# EAGLE board DS1307A (EAGLE 5.06)
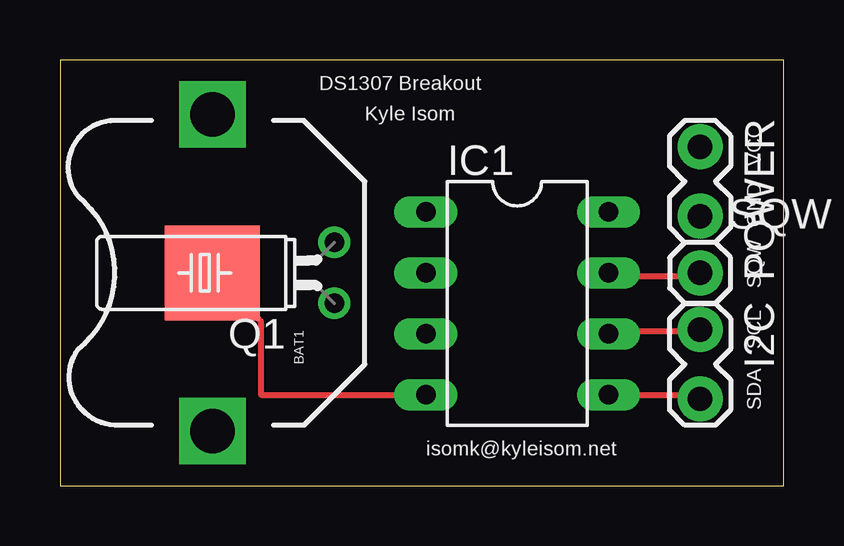
[diagram p0: board, top side]
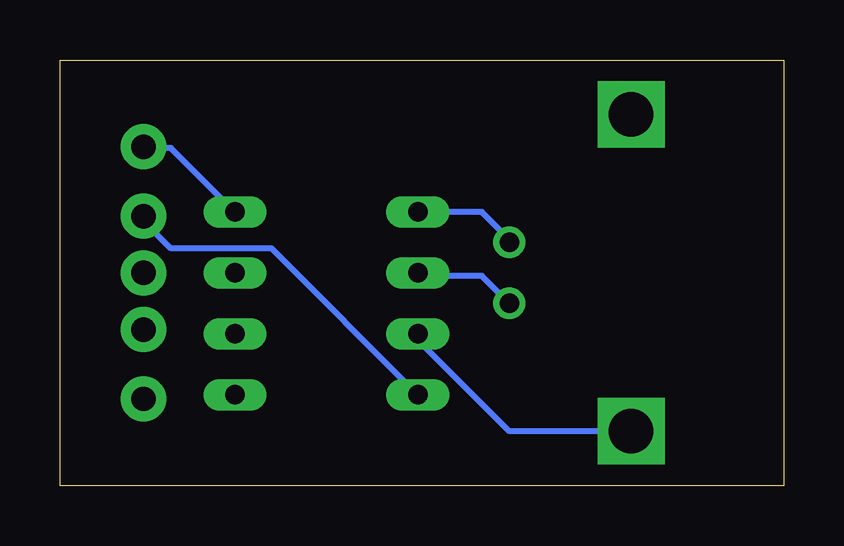
[diagram p1: board, bottom side, seen from below]

Size 30.15 x 17.77 mm. Coordinates in mm from the lower left corner, seen from the top.
Outline: 0,0 30.15,0 30.15,17.77 0,17.77 0,0
Copper layers (1*16): Top 0.035mm / dielectric 1.5mm / Bottom 0.035mm
Design rules "default": minimum track width 10mil, minimum drill 24mil, track to track 8mil, track to pad 8mil, pad to pad 8mil, via to via 8mil, smd to smd 8mil, copper to edge 40mil, drill to drill 8mil, minimum pad ring 10mil, minimum via ring 8mil, stop-mask expansion 4mil, vias tented up to drill 0mil, thermal gap 10mil

## Footprints (pad centres in the part's own frame; a part is rotated, then mirrored left to right if it is on the bottom)
BATTCON_12MM_PTH = smd 3.962 x 3.962: GND 0,0 | drill 1.854 square: VCC@1 -6.604,0; VCC@2 6.604,0
1X02_LOCK = drill 1.016 pad 1.88 round: 1 -0.178,0; 2 2.718,0
DIL08 = drill 0.813 long: 1 -3.81,-3.81; 2 -1.27,-3.81; 3 1.27,-3.81; 4 3.81,-3.81; 5 3.81,3.81; 6 1.27,3.81; 7 -1.27,3.81; 8 -3.81,3.81
TC38H = drill 0.813 round: 1 -1.27,0; 2 1.27,0
1X01 = drill 1.016 pad 1.88 round: 1 0,0

## Placement (x,y rotation side)
BAT1  [BATTCON_12MM_PTH]  6.35,8.89 90 top
I2C  [1X02_LOCK]  26.67,6.35 270 top
IC1  [DIL08]  19.05,7.62 270 top
POWER  [1X02_LOCK]  26.67,13.97 270 top
Q1  32.768  [TC38H]  11.43,8.89 90 top
SQW  M01PTH  [1X01]  26.67,8.89 0 top

## Library data of the parts
BAT1 I2C POWER SQW = SparkFun
IC1 = ic-package
Q1 = crystal

## Nets
GND: BAT1.GND IC1.4 POWER.2
N$1: I2C.1 IC1.6
N$2: BAT1.VCC@1 IC1.3
N$3: IC1.1 Q1.2
N$4: IC1.2 Q1.1
N$5: I2C.2 IC1.5
N$6: IC1.7 SQW.1
VCC: IC1.8 POWER.1

## Tracks (layer width: path | path; a pad name or v marks a point on that pad's centre or on a via)
GND
  Top 0.254: IC1.4 8.38,3.81 8.38,6.86 BAT1.GND
  Bottom 0.254: IC1.4 21.34,9.91 25.53,9.91 26.67,11.05 POWER.2
N$1
  Top 0.254: IC1.6 22.86,6.48 26.67,6.48 I2C.1
N$2
  Bottom 0.254: IC1.3 15.24,6.1 11.43,2.29 BAT1.VCC@1
N$3
  Bottom 0.254: IC1.1 12.57,11.43 11.43,10.29 Q1.2
N$4
  Bottom 0.254: Q1.1 12.57,8.76 15.24,8.76 IC1.2
N$5
  Top 0.254: IC1.5 26.67,3.81 I2C.2
N$6
  Top 0.254: IC1.7 22.86,8.76 26.67,8.76 SQW.1
VCC
  Bottom 0.254: IC1.8 25.53,14.1 26.67,14.1 POWER.1

## Text on the board
tPlace: DS1307 Breakout | Kyle Isom | VCC | GND | SQW | SCL | SDA | isomk@kyleisom.net